# Altium PCB dc_cdi_pcb.PcbDoc (part 2 of 2)
Units mm, origin at the board's own origin, x right, y up, seen from the top; angles counter-clockwise.
Board outline 102.36 x 169.29 mm, 4 copper layers (Signal Top, Ground, Vcc, Signal Bottom), stack 0.603 mm thick; 125 components, 82 nets, 511 pads, 71 vias.
Unrouted connection lines stored in the file: 139.
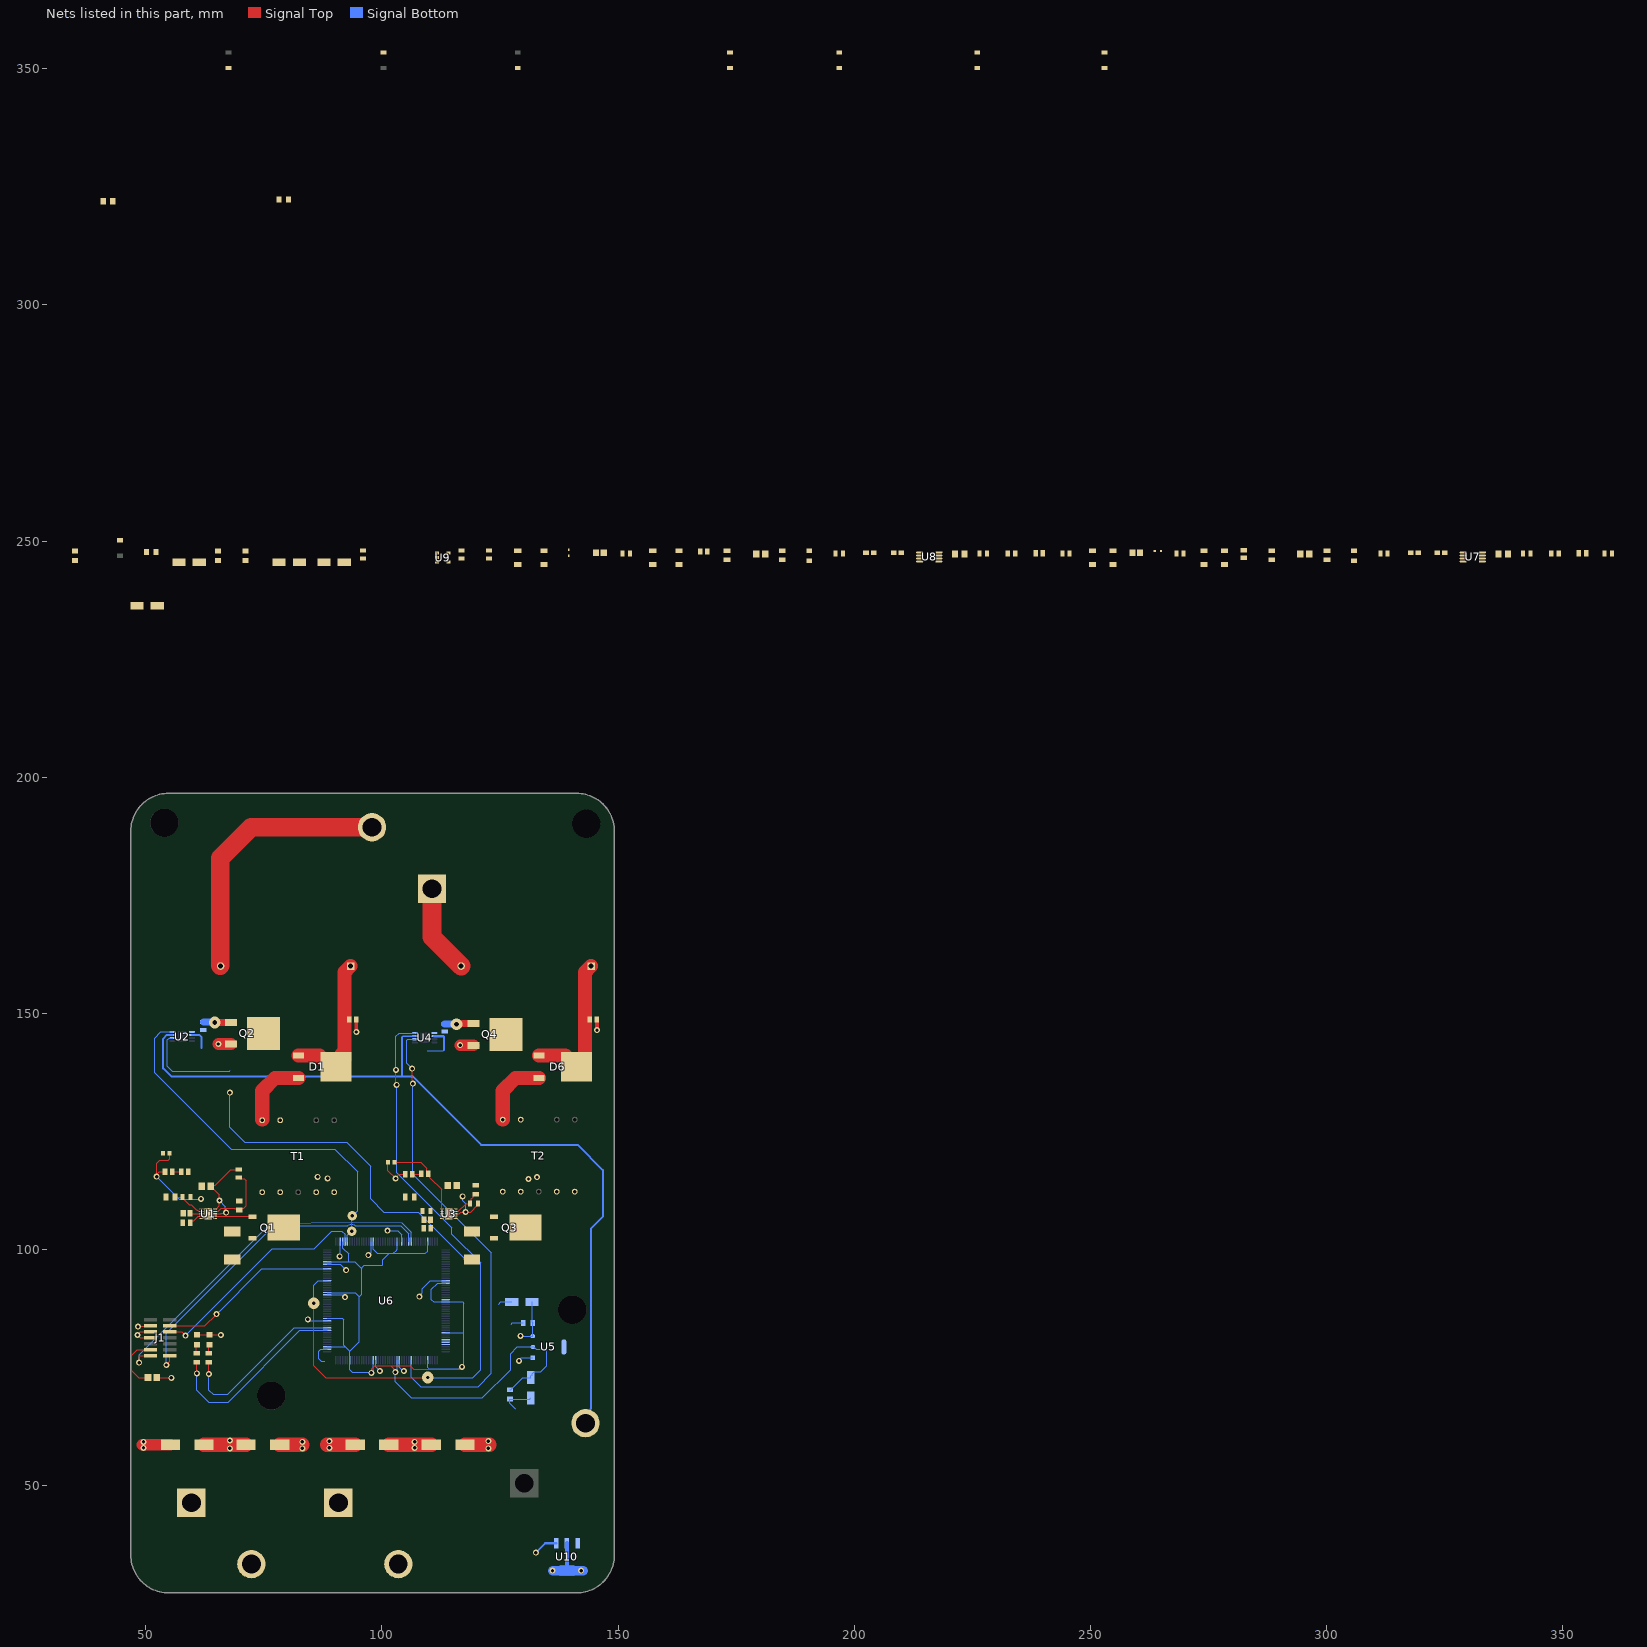
[diagram p4: the nets of this part, all layers, seen from the top]

## Part data (continued)
R17 R18: library part CMP-2001-03989-2, "RES Thick Film, 510Ω, 1%, 0.125W, 100ppm/°C, 0805", Case Code (Imperial)=0805, Case Code (Metric)=2012, Max Operating Temperature=155°C, Max Power Dissipation=125mW, Min Operating Temperature=-55°C, Package Quantity=10, Resistance=510R, Temperature Coefficient=100ppm/°C, Tolerance=1%, Voltage Rating=150V, Case/Package=0805, Composition="Thick Film", Contact Plating=Tin, Depth=1.25mm, Features="Automotive AEC-Q200", Height=0.45mm, Lead Free="Lead Free", Length=2mm, Military Standard=Not, Mount="Surface Mount", Number of Terminations=2, Packaging="Tape and Reel", Power Rating=125mW, Radiation Hardening=No, Termination=SMD/SMT, Voltage Rating (DC)=150V, Weight=0.000194oz, Width=0.049inch
R19: library part CMP-2000-05025-1, "Chip Resistor, 10 KOhm, +/- 5%, 0.125 W, -55 to 155 degC, 0805 (2012 Metric), RoHS, Tape and Reel", Manufacturer=Yageo, Package Description="2-Pin Surface Mounted Device, Body 2 x 1.25 mm", Package Reference=805, Power Rating=250mW, Resistance=10kohm, Resistance Tolerance=±5%, Resistor Case Style=0805[2012Metric], Resistor Element Type=ThickFilm, Temperature Coefficient=±100ppm/degC, Voltage Rating=150V, Automotive Qualification Standard=-, Datasheet URL=http://www.yageo.ru/pdf/RC0805.pdf, Datasheet Version="REV. 2, 09/2004", Manufacturer URL=http://www.yageo.com/, MSL=MSL1-Unlimited, Packaging=CutTape, Product Range=RCSeries, SVHC=ToBeAdvised
R20: library part CMP-2001-00580-1, Manufacturer=Panasonic, Part Number=ERA6AEB101V
R21 R32: library part CMP-08839-014008-1, "Thick Film Chip Resistor, 0805, 820kΩ, 5%, 200ppm/°C, 0.125W, 150V", Case Code (Imperial)=0805, Case Code (Metric)=2012, Max Operating Temperature=155°C, Max Power Dissipation=125mW, Min Operating Temperature=-55°C, Package Quantity=1, Resistance=820kR, Resistor Type="Thick Film", Temperature Coefficient=200ppm/°C, Tolerance=5%, Voltage Rating (DC)=150V, Case/Package=0805, Features="Automotive AEC-Q200", Height=0.024inch, Lead Free="Lead Free", Length=0.079inch, Number of Terminations=2, Packaging="Tape and Reel", RoHS Compliant=Yes, Series=MCR10, Width=0.049inch
R22 R33: library part CMP-26527-000664-1, "150kΩ ±5% 0.125W 0805 Thick Film Chip Resistor AEC-Q200 compliant", Case Code (Imperial)=0805, Case Code (Metric)=2012, Max Operating Temperature=155°C, Max Power Dissipation=125mW, Min Operating Temperature=-55°C, Resistance=150kR, Resistor Type="Thick Film", Temperature Coefficient=200ppm/°C, Tolerance=5%, Case/Package=0805, Construction=Rectangular, Contact Plating=Tin, Depth=1.25mm, Features="Automotive AEC-Q200", Height=0.026inch, Lead Free="Lead Free", Length=0.079inch, Military Standard=Not, Mount="Surface Mount", Number of Terminations=2, Packaging="Tape and Reel", Power Rating=125mW, Radiation Hardening=No, RoHS Compliant=Yes, Series=RMCF, Size Code=0805, Width=0.049inch
R23 R25 R31 R34 R36 R42: library part CMP-08839-008650-1, "Thick Film Chip Resistor, 0805, 2.2MΩ, 5%, 200ppm/°C, 0.125W, 150V", Case/Package=0805, Max Operating Temperature=155°C, Max Power Dissipation=125mW, Min Operating Temperature=-55°C, Resistance=2.2MR, Resistor Type="Thick Film", Temperature Coefficient=200ppm/°C, Tolerance=5%, Voltage Rating (DC)=150V, Contact Plating=Tin, Lead Free="Lead Free", Mount="Surface Mount", Number of Terminations=2, Packaging="Tape and Reel", Power Rating=125mW, RoHS Compliant=Yes, Series=MCR, Size Code=0805
R24 R35: library part CMP-13261-002689-1, "Res Thick Film 0805 68kΩ 5% 0.125W ±100ppm/°C Molded SMD T/R", Case Code (Imperial)=0805, Case Code (Metric)=2012, Max Operating Temperature=155°C, Max Power Dissipation=125mW, Min Operating Temperature=-55°C, Resistance=68kR, Temperature Coefficient=100ppm/°C, Tolerance=5%, Voltage Rating (DC)=150V, Case/Package=0805, Composition="Thick Film", Contact Plating=Tin, Features="Moisture Resistant", Height=0.024inch, Lead Free="Lead Free", Length=0.079inch, Number of Terminations=2, Packaging="Tape and Reel", Power Rating=125mW, Radiation Hardening=No, Width=0.049inch
R26 R37: library part CMP-2001-01786-2, "RES SMD 12K OHM 0.5% 1/8W 0805", Manufacturer=Yageo, Package=RT0805, Power Rating=0.125W, Resistance=12KΩ, Temperature="-55°C to +155°C", Temperature Coefficient="50 ppm/°C", Temperature Range High=+155°C, Temperature Range Low=-55°C, Tolerance=0.01, Voltage Rating=150V, Automotive=No, Category=Res, ComponentLink2Description=Datasheet, ComponentLink2URL=http://www.yageo.com/documents/recent/PYu-RT_1-to-0.01_RoHS_L_9.pdf, Composition="Thin Film", Device Class L1="Passive Components", Device Class L2=Resistors, Device Class L3="Chip SMD Resistors", Digikey Description="RES SMD 12K OHM 0.5% 1/8W 0805", Footprint Url=http://www.yageo.com/exep/pages/download/literatures/PYu-R_Mount_10.pdf, Height=0.6mm, Ipc Land Pattern Name=RESC200125X50, Lead Free=Yes, Manufacturer Part Number=RT0805DRE0712KL, Mouser Description="Thin Film Resistors - SMD 1/8W 12K ohm .5% 50ppm", Octopart=https://octopart.com/rt0805dre0712kl-yageo-1455327, RoHS=TRUE, Series=RT
R27 R38: library part CMP-2001-03688-2, Case Code (Imperial)=0805, Case Code (Metric)=2012, Manufacturer Package Identifier=CRCW0805-e3, Max Operating Temperature=155°C, Max Power Dissipation=125mW, Min Operating Temperature=-55°C, Resistance=22kΩ, Temperature Coefficient=100ppm/°C, Tolerance=1%, Voltage Rating=150V, Case/Package=0805, Composition="Thick Film", Contact Plating=Tin, Depth=1.25mm, Features="Automotive AEC-Q200", Height=450µm, Lead Free="Lead Free", Length=2mm, Military Standard=Not, Mount="Surface Mount", NexarPartId=39823174, Number of Pins=2, Number of Terminations=2, Packaging="Cut Tape (CT)", Power Rating=125mW, Radiation Hardening=No, REACH SVHC=Unknown, RoHS=Compliant, Schedule B="8533210045, 8533210045", Termination=SMD/SMT, Voltage Rating (DC)=150V, Weight=5.499807mg, Width=1.2446mm
R28 R39: library part CMP-1013-00050-2, Manufacturer=Panasonic, Part Number=ERJ-6GEYJ101V
R29 R40: library part CMP-02407-011730-1, "RES Thick Film, 10MΩ, 1%, 0.125W, 100ppm/°C, 0805", Case Code (Imperial)=0805, Case Code (Metric)=2012, Max Operating Temperature=155°C, Max Power Dissipation=125mW, Min Operating Temperature=-55°C, Package Quantity=10000, Resistance=10MR, Resistor Type="Thick Film", Temperature Coefficient=100ppm/°C, Tolerance=1%, Voltage Rating=150V, Case/Package=0805, Features="Automotive AEC-Q200", Height=0.02inch, Lead Free="Lead Free", Length=0.079inch, Number of Terminations=2, Packaging="Tape and Reel", Power Rating=125mW, RoHS Compliant=Yes, Series=CRCW, Termination=SMD/SMT, Weight=0.000194oz, Width=1.25mm
R30 R41: library part CMP-2001-00337-1, Manufacturer=Panasonic, Part Number=ERJ-6GEYJ103V
R43 R44 R45: library part CMP-2001-04910-2, "RES Thick Film, 10kΩ, 5%, 0.125W, 200ppm/°C, 0805", Case Code (Imperial)=0805, Case Code (Metric)=2012, Max Operating Temperature=155°C, Min Operating Temperature=-55°C, Package Quantity=5000, Power Rating=125mW, Resistance=10kR, Temperature Coefficient=200ppm/°C, Tolerance=5%, Voltage Rating=150V, Case/Package=0805, Composition="Thick Film", Contact Plating=Tin, Depth=1.25mm, Height=0.45mm, Lead Free="Lead Free", Length=2mm, Military Standard=Not, Mount="Surface Mount", Packaging="Tape and Reel", Radiation Hardening=No, Termination=SMD/SMT, Voltage Rating (DC)=150V, Weight=0.000194oz, Width=1.25mm
T1 T2: "No Description Available", Mfr_Name=Myrra, RefDes=RefDes, Type=Type
  T1: ComponentLink1Description="New link"
U1 U3: library part CMP-09139-000585-1, "IC REG CTRLR MULT TOPOLOGY 10DFN", Case/Package=DFN, Max Frequency=1MHz, Max Input Voltage=100V, Max Operating Temperature=125°C, Max Output Current=1.2A, Max Output Voltage=12V, Min Input Voltage=5.5V, Min Operating Temperature=-40°C, Package Quantity=121, Height=0.7mm, Length=3mm, Max Supply Voltage=100V, Min Supply Voltage=5.5V, Mount="Surface Mount", Number of Outputs=1, Number of Pins=10, Output Voltage=100V, Packaging=Rail/Tube, REACH SVHC="No SVHC", RoHS Compliant=Yes, Series=-, Switching Frequency=1MHz, Topology=Boost, Width=3mm
U2 U4: library part CMP-09133-000023-1, "IC GATE DRVR LOW-SIDE 8MINISOIC", Case/Package=MSOP, Max Input Voltage=18V, Max Operating Temperature=125°C, Max Output Current=4A, Max Supply Current=3mA, Min Input Voltage=4.5V, Min Operating Temperature=-40°C, Package Quantity=3000, Channel Type=Independent, Fall Time=25ns, Lead Free="Contains Lead", Max Supply Voltage=18V, Min Supply Voltage=4.5V, Mount="Surface Mount", Nominal Supply Current=3mA, Number of Drivers=2, Number of Outputs=2, Number of Pins=8, Output Current=4A, Packaging="Tape and Reel", Propagation Delay=35ns, Rise Time=14ns, RoHS Compliant=Yes, Series=-, Supply Current=3mA, Turn-On Delay Time=35ns
U5: library part CMP-209535-000001-1, "LDO Voltage Regulators 1A, 3.3V", Dropout Voltage=1.1V, Manufacturer="Advanced Monolithic Systems", Max Junction Temp=+125°C, Max Power Dissipation=1.2W, Max Supply Voltage=15V, Nominal Supply Current=5mA, Output Current=1A, Output Voltage=3.3V, Package=AMS1117, Temperature="-40°C to +125°C", Temperature Range Low=-40°C, Automotive=No, Category=IC, ComponentLink2Description=Datasheet, ComponentLink2URL=http://www.advanced-monolithic.com/pdf/ds1117.pdf, Device Class L1="Integrated Circuits (ICs)", Device Class L2="Power Management ICs", Device Class L3="Voltage Regulators - Linear", Height=1.8mm, Ipc Land Pattern Name=SOT229P700X180-4, Lead Free=Yes, Manufacturer Part Number=AMS1117-3.3, Number of Outputs=1, Octopart=https://octopart.com/ams1117-3.3-advanced+monolithic+systems-25899300, Output Type=Fixed, RoHS=TRUE, Standoff Height=0.64mm, Temperature Range High=+125°C
U6: library part CMP-0243-00078-2, "ARM Cortex-M4 32-bit MCU+FPU, 225 DMIPS, 2048 kB Flash, 256 kB Internal RAM, 140 I/Os, 176-pin LQFP, -40 to 85 degC, Tray", I/Os (High Current)=140, Manufacturer=STMicroelectronics, Operating Frequency(F) (Processor speed) (MHz)=180, Supply Voltage(Vcc) max (V)=3.6, Supply Voltage(Vcc) min (V)=1.8, ComponentLink1Description="Manufacturer URL", ComponentLink1URL=http://www.st.com/web/en/home.html, ComponentLink2Description=Datasheet, ComponentLink2URL=http://www.st.com/st-web-ui/static/active/en/resource/technical/document/data_brief/DM00053488.pdf, ComponentLink3Description="Package Specification", ComponentLink3URL=http://www.st.com/st-web-ui/static/active/en/resource/technical/document/datasheet/DM00035129.pdf, Core="ARM Cortex-M4", D/A Converter=2x12-bit, DatasheetVersion="Rev. 2", FLASH Size (Prog) (kB)=2048, Internal RAM Size (kB)=256, Mounting Technology="Surface Mount", PackageDescription="176-Pin Low Profile Quad Flat Package, 24 x 24 mm Body, 0.5 mm Pitch", PackageReference=LQFP176, PackageVersion="Rev. 4, 06/2013", Packing=Tray, PartNumber=STM32F429IIT6
U7 U8: library part CMP-0384-01726-2, "Double Channel Rail-to-Rail Operational Amplifier, 200 KHz BW, 40 mV/us SR, Industrial, 8-pin SOP (RM-8), Tube", Amplifiers Per Package=2, Generic Part Number=ADA4051-2, Input Bias Current=20pA, Input Offset Voltage=2uV, Manufacturer="Analog Devices", Code_JEDEC=MO-187-AA, ComponentLink1Description="Manufacturer URL", ComponentLink1URL=http://www.analog.com/en/index.html, ComponentLink2Description=Datasheet, ComponentLink2URL=http://www.analog.com/static/imported-files/data_sheets/ADA4051-1_4051-2.pdf, ComponentLink3Description="Package Specification", ComponentLink3URL=http://www.analog.com/static/imported-files/packages/PKG_PDF/MSOP%28RM%29/RM_8.pdf, ComponentLink4Description="Reference Circuit", ComponentLink4URL=http://www.analog.com/en/all-operational-amplifiers-op-amps/operational-amplifiers-op-amps/ada4051-2/products/product.html#product-recommendations, DatasheetVersion="Rev. B", Iq/Amp=13uA, Mounting Technology="Surface Mount", PackageDescription="8-Pin Mini Small Outline Package, Body 3 x 3 mm, Pitch 0.65 mm", PackageReference=RM-8, PartNumber=ADA4051-2ARMZ, RevisionNote="Reference Circuit URL fixed", Slew Rate=40mV/us, Small Signal Bandwidth=200KHz, V Span Max=5.5V, V Span Min=1.8V
U9: library part CMP-0384-01443-3, "Single Channel RRIO Operational Amplifier, 80 MHz BW, 35 V/us SR, Industrial, 5-pin SOT23 (RJ-5), Reel", Amplifiers Per Package=1, Generic Part Number=AD8031, Input Bias Current=450nA, Input Offset Voltage=1mV, Manufacturer="Analog Devices", Code_JEDEC=MO-178-AA, ComponentLink1Description="Manufacturer URL", ComponentLink1URL=http://www.analog.com/en/index.html, ComponentLink2Description=Datasheet, ComponentLink2URL=http://www.analog.com/static/imported-files/data_sheets/AD8031_8032.pdf, ComponentLink3Description="Package Specification", ComponentLink3URL=http://www.analog.com/static/imported-files/packages/PKG_PDF/SOT-23(RJ)/RJ_5.pdf, ComponentLink4Description="Reference Circuit", ComponentLink4URL=http://www.analog.com/en/all-operational-amplifiers-op-amps/operational-amplifiers-op-amps/ad8031/products/product.html#product-recommendations, DatasheetVersion="Rev. D", Iq/Amp=900uA, Mounting Technology="Surface Mount", PackageDescription="5-Pin Small Outline Transistor Package, Body 2.9 x 1.6 mm, Pitch 0.95 mm", PackageReference=RJ-5, PackageVersion=121608-A, Packing=Reel, PartNumber=AD8031ARTZ-REEL7, RevisionNote="Reference Circuit URL fixed", Slew Rate=35V/us, Small Signal Bandwidth=80MHz, V Span Max=12V, V Span Min=2.7V
U10: library part CMP-04917-000007-1, "IC REG LINEAR 5V 1.5A SOT223-4", Dropout Voltage=2V, Manufacturer="Texas Instruments", Max Junction Temp=+150°C, Max Supply Voltage=30V, Min Supply Voltage=7.5V, Nominal Supply Current=8mA, Output Current=1.5A, Output Voltage=5V, Package=DCY0004A, Temperature="0°C to +125°C", Temperature Range High=+125°C, Temperature Range Low=0°C, Accuracy Percentage=3%, Automotive=No, Category=IC, ComponentLink2Description=Datasheet, ComponentLink2URL=http://www.ti.com/lit/ds/symlink/lm7800.pdf, Device Class L1="Integrated Circuits (ICs)", Device Class L2="Power Management ICs", Device Class L3="Voltage Regulators - Linear", Digikey Description="IC REG LINEAR 5V 1.5A SOT223-4", Height=1.8mm, Lead Free=Yes, Manufacturer Part Number=LM7805MP/NOPB, Number of Outputs=1, Octopart=https://octopart.com/lm7805mp%2Fnopb-texas+instruments-74629991, Output Type=Fixed, RoHS=TRUE, Standoff Height=0.02mm

## Free pads (board coordinates)
  round 6 hole 6 paste-2539.97 mask+0: 3(53.975,190.373) 3(76.581,69.088) 3(140.335,87.249) 3(143.256,190.119)

## Via types
v1: diameter 1.27, hole 0.711, Signal Top to Signal Bottom, 65 vias
v2: diameter 2, hole 0.711, Signal Top to Signal Bottom, 2 vias
v3: diameter 2.5, hole 0.711, Signal Top to Signal Bottom, 2 vias
v4: diameter 2.5, hole 1, Signal Top to Signal Bottom, 2 vias

## Nets (pads, with @x,y where several pads share a name; then routed paths per layer and width w, separated by ;. In a path a pad name is that pad's centre, name@x,y a point inside that pad or via, vN(x,y) a via of type N, cw(c..) or ccw(c..) an arc to the next point about the centre after c; other vN are vias at no path point)
+3V3: C14.2 C16.1 C17.1 J1.3 R19.2 U5.2 U5.4 U6.15 U6.23 U6.36 U6.49 U6.62 U6.72 U6.82 U6.91 U6.103 U6.114 U6.127 U6.136 U6.149 U6.159 U6.172 | length 215
  Signal Top w0.254: v1(48.387,83.693) 48.45,83.757 50.985,83.757 J1.3@51.048,83.82 ; v1(97.79,73.914) 97.873,73.997 97.873,74.759 98.552,75.438 101.832,75.438 ; v1(102.87,74.041) 102.87,74.316 102.585,74.601 102.585,74.685 101.907,75.364 101.832,75.438 ; v1(116.967,75.184) 116.818,75.184 116.31,74.676 106.807,74.676 106.045,75.438 101.832,75.438
  Signal Bottom w0.254: U6.91@88.415,79.404 92.3,79.404 ; U6.103@88.415,85.404 91.634,85.404 91.948,85.09 91.948,79.756 92.3,79.404 ; U6.114@88.415,90.904 94.389,90.904 95.235,90.058 ; U6.127@88.415,97.404 92.964,97.404 ; U6.136@91.715,101.704 91.715,100.309 92.964,99.06 92.964,97.404 ; U6.72@98.215,76.604 98.215,74.378 98.254,74.378 v1(97.79,73.914) 97.663,74.041 93.726,74.041 93.215,74.552 U6.82@93.215,76.604 93.215,78.489 ; U6.149@98.215,101.704 98.215,100.032 99.06,99.187 101.592,99.187 ; v1@102.87,74.422 v1(102.87,74.041) ; U6.62@103.215,76.604 103.215,74.386 v1(102.87,74.041) ; U6.159@103.215,101.704 103.215,100.04 103.124,99.949 103.124,99.905 102.384,99.165 ; 109.706,75.416 109.706,74.952 109.855,74.803 116.586,74.803 v1(116.967,75.184) 117.348,75.565 117.348,82.55 ; 109.706,75.594 109.715,75.603 ; U6.49@109.715,76.604 109.715,75.603 ; U6.172@109.715,101.704 109.715,99.682 109.198,99.165 102.384,99.165 ; 109.728,75.438 109.715,75.425 109.715,75.603 ; 109.736,75.624 109.715,75.603 ; U6.36@113.515,82.404 117.202,82.404 117.348,82.55 ; U6.23@113.515,88.9 117.094,88.9 117.348,88.646 117.348,82.55 ; U6.23@113.515,88.904 113.511,88.9 110.998,88.9 110.49,89.408 110.49,91.567 111.827,92.904 U6.15@113.515,92.904 ; C16.1@127.127,70.342 127.252,70.342 129.808,72.898 C14.2@131.572,72.898 131.572,73.257 131.721,73.406 131.826,73.406 131.826,73.752 132.245,74.171 133.607,74.171 134.874,75.438 134.874,78.591 134.568,78.898 132.671,78.898 132.193,79.375 U5.2@131.96,79.375 128.651,79.375 127.254,77.978 127.254,74.549 121.285,68.58 106.268,68.58 102.87,71.978 v1(102.87,74.041) ; 92.3,79.404 93.215,78.489 ; 92.964,97.404 94.239,97.404 95.619,96.024 ; 93.215,78.489 95.235,80.509 95.235,90.058 ; 95.235,90.058 95.758,90.581 95.758,95.885 95.619,96.024 ; 95.619,96.024 96.243,96.647 100.054,96.647 100.203,96.796 100.203,97.798 101.592,99.187 ; 101.592,99.187 102.362,99.187 102.384,99.165
+5: C30.2 C31.1 R44.2 U2.6 U4.6 U7.8 U8.8 U9.5 U10.3 | length 13
  Signal Bottom w0.254: 109.601,142.113 113.03,142.113 113.157,142.24 ; U4.6@111.125,145.176 U4.6@111.14,145.161 ; 113.034,145.161 113.157,145.038
  Signal Bottom w0.4: U2.6@59.817,145.43 61.373,145.43 61.849,144.954 61.849,142.683
  Signal Bottom w0.5: 113.157,142.24 113.157,145.038
  Signal Bottom w0.54: U4.6@111.14,145.161 113.034,145.161
GND: C1.1 C2.2 C4.1 C5.1 C6.2 C7.1 C8.2 C10.1 C11.1 C12.2 C13.1 C14.1 C15.2 C16.2 C17.2 C26.1 C27.1 C28.2 C29.2 C30.1 C31.2 C32.1 C33.2 C34.1 C35.1 C36.1 C37.1 D5.2 D10.2 D16.1 D17.2 D21.1 D22.2 J1.5 J1.7 J2.2 LED1.1 LED2.1 Q2.3 Q4.3 R3.1 R4.1 R5.1 R7.1 R11.1 R12.1 R13.1 R15.1 R20.1 R27.1 R38.1 R45.1 T1.4 T2.4 U1.5 U1.11 U3.5 U3.11 U5.1 U6.14 U6.22 U6.61 U6.71 U6.90 U6.102 U6.113 U6.126 U6.135 U6.148 U7.4 U8.4 U9.2 U10.2 U10.4 | length 192.9
  Signal Top w0.254: J1.7@51.048,81.28 48.895,81.28 v1(48.26,81.915) 48.895,82.55 J1.5@51.048,82.55 ; R20.1@52.385,72.898 55.372,72.898 v1(55.435,72.834) v1@55.499,72.771 ; LED1.1@60.833,81.949 LED2.1@63.5,81.949 63.534,81.915 v1(65.913,81.915) ; Q2.3@68.044,143.51 Q2.3@68.072,143.482 ; 83.185,58.674 83.947,57.912 ; C2.2@94.603,148.717 C2.2@94.615,148.705 ; C11.1@101.306,118.491 101.306,116.694 v1(102.944,115.056) 102.944,115.23 103.665,115.951 C12.2@104.914,115.951 ; C8.2@145.53,148.717 C8.2@145.542,148.705
  Signal Top w0.7: v1(94.615,146.05) C2.2@94.615,148.705
  Signal Top w0.8: v1(145.542,146.431) C8.2@145.542,148.705
  Signal Top w2.5: 49.276,58.674 C37.1@55.251,58.674 ; v1(65.405,143.51) Q2.3@68.044,143.51 ; v1(116.586,143.256) 116.6,143.242 Q4.3@119.377,143.242
  Signal Top w3: C34.1@78.353,58.674 83.185,58.674 ; 88.392,58.674 C35.1@94.367,58.674 ; C36.1@117.596,58.674 122.809,58.674
  Signal Bottom w0.254: v1(67.818,133.223) 67.818,125.857 70.993,122.682 92.583,122.682 97.663,117.602 97.663,110.744 100.457,107.95 107.696,107.95 117.475,98.171 117.475,97.79 ; v1(84.328,85.217) 84.641,84.904 U6.102@88.415,84.904 ; 87.884,76.327 87.122,76.327 86.614,76.835 86.614,78.486 87.032,78.904 U6.90@88.415,78.904 ; U6.113@88.415,90.404 91.714,90.404 v1(92.202,89.916) ; U6.126@88.415,96.904 91.183,96.904 v1(92.456,95.631) ; v1(91.059,98.552) 91.206,98.699 91.206,101.695 U6.135@91.215,101.704 ; v1(97.155,98.806) 97.715,99.366 U6.148@97.715,101.704 ; U6.71@98.715,76.604 98.715,75.148 v1(99.568,74.295) ; U6.61@103.715,76.604 103.715,75.105 104.525,74.295 v1(104.648,74.295) ; v1(107.95,90.043) 107.95,90.21 108.585,90.845 108.585,91.694 110.295,93.404 U6.14@113.515,93.404 ; 124.714,88.392 125.222,88.9 C13.1@127.517,88.9 ; 127.381,84.201 127.635,84.455 C15.2@129.937,84.455 ; 128.27,66.294 127.127,67.437 C16.2@127.127,68.342 131.316,68.342 C14.1@131.572,68.598 ; v1@128.905,76.454 129.536,77.085 U5.1@131.96,77.085
  Signal Bottom w0.854: U10.4@139.192,32.025 U10.2@139.192,37.825
  Signal Bottom w2: v1(136.141,32.025) U10.4@139.192,32.025 v1(142.191,32.025) v1@142.621,32.025
  other v1: 83.185,57.912 122.555,57.912 49.53,58.039 88.9,58.039 49.53,59.309 83.185,59.309 88.9,59.436 122.555,59.436 129.032,76.454
NetC1_2: C1.2 C7.2 C13.2 C15.1 C32.2 C33.1 J2.1 R1.2 R9.2 T1.7 T1.10 U1.8 U1.10 U3.8 U3.10 U5.3 U10.1 | length 43.4
  Signal Top w0.254: C1.2@63.815,113.361 65.62,111.556 v1(65.62,110.392) 65.62,109.229 ; C1.2@63.815,113.411 64.046,113.642 64.747,113.642 68.034,116.929 R1.2@69.723,116.929 ; U1.8@64.662,107.577 65.97,107.577 66.04,107.647 66.88,107.647 v1(67.056,107.823) ; U1.10@64.966,108.575 65.62,109.229 ; 65.62,109.22 65.62,109.229 ; U3.8@115.589,107.569 116.41,107.569 116.713,107.872 117.651,107.872 v1(117.729,107.95) 118.831,107.95 120.358,109.477 R9.2@120.358,109.728
  Signal Bottom w0.254: v1(65.62,110.392) 66.899,109.114 66.899,107.98 v1(67.056,107.823) ; v1(117.094,111.252) 117.094,110.363 117.729,109.728 v1(117.729,107.95) ; v1@129.286,81.788 129.409,81.665 U5.3@131.96,81.665 131.96,84.432 C15.1@131.937,84.455 131.817,84.575 C13.2@131.817,88.9
  Signal Bottom w0.5: 134.599,37.825 U10.1@136.892,37.825
  Signal Bottom w0.54: v1(132.588,35.814) 134.599,37.825
  other v1: 129.347,81.727
NetC2_1: C2.1 C3.1 D1.1 D1.3 D2.1 Q2.4 R2.2 | length 34.5
  Signal Top w3: D1.1@82.357,141.074 86.8,141.074 D1.3@87.59,140.284 ; D1.3@88.707,140.284 D1.3@90.307,138.684 ; C3.1@93.379,160.02 92.075,158.716 92.075,142.041 ; D1.3@90.307,138.684 90.457,138.684 92.057,140.284 92.075,142.041 ; D1.3@90.307,138.684 90.551,138.928 90.551,140.064 92.075,142.041
NetC3_2: C3.2 J3.1 | length 57.7
  Signal Top w0.254: C3.2@65.786,160.113 C3.2@65.879,160.02
  Signal Top w4: C3.2@65.786,160.113 65.786,182.88 72.309,189.403 97.917,189.403
NetC4_2: C4.2 U1.3 | length 2.2
  Signal Top w0.254: C4.2@59.309,107.507 59.371,107.569 U1.3@61.517,107.569
NetC5_2: C5.2 R8.2 U1.1 | length 21.1
  Signal Top w0.254: v1(52.324,115.443) v1@52.324,115.951 ; R8.2@54.114,116.459 52.832,116.459 v1@52.324,115.951 ; C5.2@55.412,120.523 55.118,120.229 55.118,119.253 54.737,118.872 52.959,118.872 52.324,118.237 52.324,118.191 v1@52.324,115.951
  Signal Bottom w0.254: v1@52.08,115.443 v1(52.324,115.443) 57.15,110.617 61.595,110.617 v1(61.722,110.744)
NetC6_1: C6.1 R8.1 | length 1.9
  Signal Top w0.254: R8.1@55.614,116.459 C6.1@57.543,116.459
NetC8_1: C8.1 C9.1 D6.1 D6.3 D7.1 Q4.4 R10.2 | length 29.1
  Signal Top w0.254: D6.3@138.844,141.074 D6.3@141.605,141.074
  Signal Top w3: D6.1@133.284,141.074 D6.3@138.844,141.074 ; D6.3@139.634,140.284 D6.3@141.234,138.684 ; 143.002,142.041 143.002,148.844 143.002,158.716 C9.1@144.306,160.02
NetC9_2: C9.2 J3.2 | length 18.9
  Signal Top w4: 110.617,176.403 110.617,166.209 C9.2@116.806,160.02
NetC10_2: C10.2 U3.3
NetC11_2: C11.2 R16.2 U3.1 | length 17.2
  Signal Top w0.254: C11.2@102.656,118.491 108.204,118.491 109.478,117.217 109.478,116.79 109.478,116.648 109.627,116.499 109.724,116.499 110.198,116.025 110.198,115.227 112.649,112.776 112.649,108.712
NetC12_1: C12.1 R16.1 | length 2.2
  Signal Top w0.254: C12.1@106.414,115.951 108.47,115.951 R16.1@108.597,116.078
NetC18_1: C18.1 R29.1 R30.2
NetC18_2: C18.2 R26.1 R28.1 U7.7
NetC19_1: C19.1 R25.1 R27.2
NetC19_2: C19.2 C20.1 R23.1 R31.2
NetC20_2: C20.2 U7.3
NetC21_1: C21.1 C25.1 C27.2 C29.1 R21.2 R23.2 R24.2 R32.2 R34.2 R35.2 R43.1 U9.1
NetC21_2: C21.2 R29.2 U7.5
NetC22_1: C22.1 R40.1 R41.2
NetC22_2: C22.2 R37.1 R39.1 U8.7
NetC23_1: C23.1 R36.1 R38.2
NetC23_2: C23.2 C24.1 R34.1 R42.2
NetC24_2: C24.2 U8.3
NetC25_2: C25.2 R40.2 U8.5
NetC26_2: C26.2 C28.1 R44.1 R45.2 U9.3
NetC34_2: C34.2 C35.2 C36.2 C37.2 | length 17.9
  Signal Top w3: C37.2@62.351,58.674 C34.2@71.253,58.674 ; C35.2@101.467,58.674 C36.2@110.496,58.674
  other v1: 67.818,57.912 106.934,58.039 106.934,59.309 67.818,59.563
NetD1_2: D1.2 T1.5 | length 14.9
  Signal Top w3: T1.5@74.676,127.508 74.676,133.604 77.366,136.294 D1.2@82.357,136.294
NetD2_2: D2.2 D3.1
NetD3_2: D3.2 D4.1
NetD4_2: D4.2 D5.1
NetD6_2: D6.2 T2.5 | length 14.9
  Signal Top w3: T2.5@125.603,127.508 125.603,133.604 128.293,136.294 D6.2@133.284,136.294
NetD8_2: D8.2 D9.1
NetD11_2: LED2.2 R17.2 | length 1.8
  Signal Top w0.254: R17.2@63.373,78.105 63.373,79.722 LED2.2@63.5,79.849
NetD12_2: LED1.2 R18.2 | length 1.8
  Signal Top w0.254: R18.2@60.706,78.105 60.706,79.722 LED1.2@60.833,79.849
NetD13_1: D13.1 D14.2 R28.2 U6.40
NetD13_2: D13.2 D15.2 D16.2
NetD14_1: D14.1 D15.1 D17.1
NetD18_1: D18.1 D19.2 R39.2 U6.41
NetD18_2: D18.2 D20.2 D21.2
NetD19_1: D19.1 D20.1 D22.1
NetJ1_4: J1.4 U6.124 | length 38.3
  Signal Top w0.254: J1.4@55.118,83.82 62.484,83.82 v1(64.998,86.334)
  Signal Bottom w0.254: v1(64.998,86.334) 74.568,95.904 87.357,95.904 U6.124@88.415,95.904
NetJ1_6: J1.6 U6.137 | length 48.4
  Signal Top w0.254: J1.6@55.118,82.55 57.658,82.55 v1(58.42,81.788)
  Signal Bottom w0.254: v1(58.42,81.788) 76.835,100.203 85.725,100.203 89.408,103.886 91.567,103.886 92.207,103.246 92.207,102.713 92.215,102.705 U6.137@92.215,101.704
NetJ1_11: J1.11 R20.2 | length 11.8
  Signal Top w0.254: R20.2@50.485,72.898 48.514,72.898 46.99,74.422 46.99,77.47 48.26,78.74 J1.11@51.048,78.74
NetJ1_13: J1.13 U6.165 | length 77.3
  Signal Top w0.254: v1(48.641,76.073) 48.641,77.321 48.79,77.47 J1.13@51.048,77.47
  Signal Bottom w0.254: v1(48.641,76.073) 48.641,77.724 76.507,105.59 93.578,105.775 cw(c93.599,103.886) 93.676,105.773 ccw(c93.73,107.153) 93.715,105.772 104.267,105.664 104.341,105.59 106.244,103.687 U6.165@106.244,101.704
NetJ1_14: J1.14 U6.164 | length 72.1
  Signal Top w0.254: v1(54.376,75.545) 54.376,75.585 55.118,76.327 J1.14@55.118,77.47
  Signal Bottom w0.254: v1(54.376,75.545) 54.376,82.316 77.089,105.029 92.824,105.029 cw(c93.599,103.886) 94.374,105.029 104.013,105.029 105.726,103.316 105.726,102.744 ; U6.164@105.715,101.704 105.715,102.662 105.736,102.684
NetJ4_1: J4.1 R36.2
NetJ4_2: J4.2 R25.2
NetQ1_1: Q1.1 U1.7 | length 8.1
  Signal Top w0.254: U1.7@64.662,107.069 68.713,107.069 68.778,107.004 70.922,107.004 70.987,107.069 72.517,107.069 Q1.1@72.644,106.942
NetQ1_2: Q1.2 T1.6 T1.9
  other v1: 88.519,115.062 86.422,115.4
NetQ1_3: Q1.3 R5.2 U1.6
NetQ2_1: Q2.1 R6.1 | length 5.9
  Signal Top w1.5: v4(64.643,148.082) Q2.1@68.072,148.082
  Signal Bottom w1.5: R6.1@62.23,148.145 64.58,148.145 v4(64.643,148.082)
NetQ3_1: Q3.1 U3.7
NetQ3_2: Q3.2 T2.6 T2.9
NetQ3_3: Q3.3 R13.2 U3.6
NetQ4_1: Q4.1 R14.1 | length 6.1
  Signal Top w0.254: Q4.1@119.363,147.828 Q4.1@119.377,147.842
  Signal Top w1.5: v4@116.713,147.828 Q4.1@119.363,147.828
  Signal Bottom w0.254: v4@116.649,147.764 v4@116.713,147.828
  Signal Bottom w1.5: R14.1@113.284,147.764 v4@116.649,147.764
  other v4: 115.824,147.701
NetR1_1: R1.1 R4.2 U1.9 | length 14.1
  Signal Top w0.254: U1.9@64.975,108.067 65.176,108.067 65.195,108.085 65.33,108.085 65.957,108.712 68.875,108.712 68.914,108.674 69.572,108.674 R4.2@69.85,108.396 70.051,108.396 70.427,108.772 70.789,108.772 71.247,109.23 71.247,114.554 70.85,114.951 69.999,114.951 R1.1@69.723,115.227
NetR2_1: R2.1 R3.2 U1.2 | length 7
  Signal Top w0.254: R3.2@56.196,111.125 R2.1@57.849,111.125 57.849,110.875 59.206,109.517 59.647,109.517 60.706,108.458 60.814,108.458 61.195,108.077 61.564,108.077 61.572,108.069 U1.2@61.83,108.069
NetR6_2: R6.2 U2.5
NetR7_2: R7.2 U1.4 | length 2.7
  Signal Top w0.254: R7.2@59.449,105.664 59.449,105.715 59.797,106.063 60.156,106.063 61.154,107.061 61.564,107.061 U1.4@61.566,107.063
NetR9_1: R9.1 R12.2 U3.9 | length 6.4
  Signal Top w0.254: U3.9@115.589,108.069 116.192,108.069 117.851,109.728 R9.1@118.656,109.728 118.932,110.004 118.932,110.743 119.311,111.121 119.311,111.322 119.687,111.698 R12.2@119.888,111.698
NetR10_1: R10.1 R11.2 U3.2
NetR14_2: R14.2 U4.5
NetR15_2: R15.2 U3.4
NetR17_1: R17.1 U6.99 | length 37.1
  Signal Top w0.254: v1(63.373,73.66) R17.1@63.373,76.138
  Signal Bottom w0.254: v1(63.373,73.66) 63.373,70.231 64.262,69.342 67.357,69.342 81.419,83.404 87.414,83.404 U6.99@88.415,83.404
NetR18_1: R18.1 U6.98 | length 40.8
  Signal Top w0.254: v1(60.833,73.787) R18.1@60.833,76.138
  Signal Bottom w0.254: v1(60.833,73.787) 60.833,70.231 63.373,67.691 67.437,67.691 82.642,82.896 U6.98@88.415,82.896
NetR19_1: R19.1 U6.39
NetR21_1: R21.1 R22.2 U7.2
NetR22_1: R22.1 R30.1 R31.1 U7.1
NetR24_1: R24.1 R26.2 U7.6
NetR32_1: R32.1 R33.2 U8.2
NetR33_1: R33.1 R41.1 R42.1 U8.1
NetR35_1: R35.1 R37.2 U8.6
NetR43_2: R43.2 U9.4
NetT2_7: T2.7 T2.10
  other v1: 131.064,114.935 132.842,115.316
NetU2_2: U2.2 U6.161 | length 25.5
  Signal Bottom w0.254: U2.2@55.715,144.78 55.681,144.745 54.946,144.745 54.61,144.41 54.61,138.811 55.626,137.795 67.818,137.795 67.945,137.922 ; v1(101.191,104.013) 103.378,104.013 104.215,103.176 U6.161@104.215,101.704
NetU2_3: J5.2 U2.3 U4.3 | length 177
  Signal Bottom w0.254: 53.681,144.613 53.703,144.591 ; 104.521,145.161 104.648,145.161 ; U4.3@107.008,145.161 107.038,145.161 U4.3@107.023,145.176
  Signal Bottom w0.4: 53.681,144.613 54.498,145.43 U2.3@55.715,145.43 ; 53.703,144.591 53.703,138.36 55.42,136.643 104.267,136.643 ; 104.267,136.623 104.267,136.643 ; 104.521,145.161 104.267,144.907 104.267,136.643 ; 104.648,145.161 U4.3@107.008,145.161 ; J5.2@143.122,63.246 144.195,64.319 144.195,66.209 144.272,66.285 144.272,104.394 146.812,106.934 146.812,116.84 141.478,122.174 121.031,122.174 106.562,136.643 104.267,136.643
NetU2_4: U2.4 U6.138 | length 79
  Signal Top w0.254: v2(93.599,103.886) 93.599,107.023 v2(93.73,107.153)
  Signal Bottom w0.254: U2.4@55.715,146.08 53.243,146.08 51.943,144.78 51.943,137.414 68.072,121.285 90.043,121.285 94.869,116.459 94.869,108.204 94.72,108.055 v2(93.73,107.153) ; U6.138@92.715,101.704 92.715,103.002 v2(93.599,103.886)
NetU4_2: U4.2 U6.56 | length 102.3
  Signal Top w0.254: v1(106.426,138.303) 106.489,138.239 106.489,135.191 v1(106.553,135.128)
  Signal Bottom w0.254: U6.56@106.215,76.604 106.215,72.982 108.204,70.993 120.396,70.993 123.19,73.787 123.19,99.314 106.553,115.951 v1(106.553,135.128) ; v1(106.426,138.303) 105.283,139.446 105.283,144.272 105.537,144.526 U4.2@107.023,144.526
NetU4_4: U4.4 U6.119 | length 139.5
  Signal Top w0.254: v3@85.598,88.519 85.598,75.438 88.138,72.898 v3(109.728,72.898) ; v1(102.997,138.049) 102.997,135.001 v1(103.124,134.874)
  Signal Bottom w0.254: v3(85.598,88.646) 85.598,92.456 86.515,93.373 88.384,93.373 U6.119@88.415,93.404 ; v1(102.997,138.049) 102.997,145.161 103.662,145.826 U4.4@107.023,145.826 ; v1(103.124,134.874) 103.124,116.312 114.796,104.64 114.796,103.263 120.904,97.155 120.904,74.549 119.253,72.898 v3(109.728,72.898)
pads on no net: D7.2 D8.1 D9.2 D10.1 J1.1 J1.2 J1.8 J1.9 J1.10 J1.12 J5.1 T1.1 T1.2 T1.8 T2.1 T2.2 T2.8 U2.1 U2.7 U2.8 U2.9 U4.1 U4.7 U4.8 U4.9 U6.1 U6.2 U6.3 U6.4 U6.5 U6.6 U6.7 U6.8 U6.9 U6.10 U6.11 U6.12 U6.13 U6.16 U6.17 U6.18 U6.19 U6.20 U6.21 U6.24 U6.25 U6.26 U6.27 U6.28 U6.29 U6.30 U6.31 U6.32 U6.33 U6.34 U6.35 U6.37 U6.38 U6.42 U6.43 U6.44 U6.45 U6.46 U6.47 U6.48 U6.50 U6.51 U6.52 U6.53 U6.54 U6.55 U6.57 U6.58 U6.59 U6.60 U6.63 U6.64 U6.65 U6.66 U6.67 U6.68 U6.69 U6.70 U6.73 U6.74 U6.75 U6.76 U6.77 U6.78 U6.79 U6.80 U6.81 U6.83 U6.84 U6.85 U6.86 U6.87 U6.88 U6.89 U6.92 U6.93 U6.94 U6.95 U6.96 U6.97 U6.100 U6.101 U6.104 U6.105 U6.106 U6.107 U6.108 U6.109 U6.110 U6.111 U6.112 U6.115 U6.116 U6.117 U6.118 U6.120 U6.121 U6.122 U6.123 U6.125 U6.128 U6.129 U6.130 U6.131 U6.132 U6.133 U6.134 U6.139 U6.140 U6.141 U6.142 U6.143 U6.144 U6.145 U6.146 U6.147 U6.150 U6.151 U6.152 U6.153 U6.154 U6.155 U6.156 U6.157 U6.158 U6.160 U6.162 U6.163 U6.166 U6.167 U6.168 U6.169 U6.170 U6.171 U6.173 U6.174 U6.175 U6.176
copper on no net: | length 33.8
  Signal Top w0.254: v1(67.818,137.795) 67.818,133.223 67.945,133.096 ; v1(103.251,110.49) 103.418,110.49 104.053,111.125 104.232,111.125 105.221,111.125 ; 107.123,111.125 108.776,111.125 108.776,110.875 110.133,109.517 110.574,109.517 111.633,108.458 111.741,108.458 112.122,108.077 112.491,108.077 112.499,108.069 112.757,108.069 ; 110.236,107.507 110.298,107.569 112.444,107.569 ; 110.376,105.664 110.376,105.715 110.724,106.063 111.083,106.063 112.081,107.061 112.491,107.061 112.493,107.063 ; 115.589,107.069 123.444,107.069 123.571,106.942 ; 115.824,113.538 116.756,113.538 116.905,113.538 117.094,113.349 117.094,111.252 117.094,109.767 116.547,109.22 115.902,108.575
  Vcc w0.254: 132.08,115.316 132.207,115.443
  other v1: 128.27,66.294 87.757,76.2 127.381,84.201 124.714,88.392

## Polygon pours and split planes (outlines as drawn)
NetC1_2 on Vcc "NETC1_2_L03_P003" (solid, pour order 3): 45.085,120.396 45.339,120.65 149.225,120.65 149.225,26.152 44.841,26.152
GND on Ground "GND_L02_P004" (solid, pour order 4): 45.085,186.309 45.085,186.69 45.085,28.956 150.241,28.956 150.241,195.58 53.721,195.58
GND on Signal Top "GND_L01_P006" (solid, pour order 6): 45.974,115.062 50.673,119.761 68.072,119.761 72.136,115.697 72.136,100.965 74.422,98.679 86.36,98.679 94.488,106.807 94.488,117.729 96.266,119.507 96.393,119.38 115.57,119.38 122.428,112.522 122.428,99.314 125.095,96.647 125.222,96.774 132.969,96.774 146.685,110.49 146.685,116.713 149.352,119.38 149.352,28.956 45.847,28.956 45.847,115.062

## Other copper
Signal Top:
  region net NetC5_2: 61.341,108.458 61.214,108.585 61.214,110.744 61.468,110.998 61.976,110.998 61.976,110.363 61.595,109.982 61.595,108.966 62.103,108.458
  region net NetC2_1: 71.501,149.352 72.009,149.86 93.218,149.86 93.218,139.065 92.837,138.684 91.821,139.7 72.517,139.7 72.517,139.827 71.501,140.843
  region net NetC8_1: 122.809,142.113 125.349,139.573 142.875,139.573 144.018,140.716 144.018,149.733 123.444,149.733 122.809,149.098 122.809,142.24
  region: 117.348,102.616 117.475,102.743 121.539,102.743 122.555,101.727 124.714,101.727 124.714,102.997 122.555,105.156 117.729,105.156 116.205,106.68 115.443,106.68 115.443,104.521
  region net GND: 114.935,104.648 120.264,99.319 121.793,99.319 121.793,97.155 123.571,95.377 149.352,95.377 149.352,91.313 111.76,91.313 111.76,106.172 113.411,106.944 113.411,110.109 114.808,110.109 114.935,110.236 114.935,105.791
  pour cut-out: 113.284,107.569 113.347,107.632 113.538,107.632
  region: 117.221,106.299 124.333,106.299 124.46,106.426 124.46,107.061 116.459,107.061
  region net NetT2_7: 128.143,111.697 128.905,110.934 129.921,110.934 130.556,111.569 130.556,113.157 131.953,114.554 138.748,114.554 139.827,113.474 139.827,111.316 140.208,110.934 141.605,110.934 141.986,111.316 141.986,113.792 139.573,116.205 131.127,116.205 128.143,113.221 128.143,111.823
  region net NetQ3_2: 124.333,111.506 125.222,110.617 125.857,110.617 127.508,108.966 127.508,105.283 130.683,108.458 125.857,113.284 124.841,113.284 124.333,112.776 124.333,111.633
  region net NetQ3_2: 131.191,108.458 134.112,108.458 135.763,110.109 135.763,112.395 136.398,113.03 137.668,113.03 138.176,112.522 138.176,109.093 133.858,104.775 133.858,101.346 126.238,101.346 126.238,107.315 127.381,108.458
  region net NetQ1_2: 80.264,108.458 83.185,108.458 84.836,110.109 84.836,112.395 85.471,113.03 86.741,113.03 87.249,112.522 87.249,109.093 82.931,104.775 82.931,101.346 75.311,101.346 75.311,107.315 76.454,108.458
  region net NetQ1_2: 73.406,111.506 74.295,110.617 74.93,110.617 76.581,108.966 76.581,105.283 79.756,108.458 74.93,113.284 73.914,113.284 73.406,112.776 73.406,111.633
  region net NetQ1_2: 77.216,111.697 77.978,110.934 78.994,110.934 79.629,111.569 79.629,113.157 81.026,114.554 87.82,114.554 88.9,113.474 88.9,111.316 89.281,110.934 90.678,110.934 91.059,111.316 91.059,113.792 88.646,116.205 80.2,116.205 77.216,113.221 77.216,111.823
  region net NetQ1_1: 66.294,106.299 73.406,106.299 73.533,106.426 73.533,107.061 65.532,107.061
  pour cut-out: 62.357,107.569 62.42,107.632 62.611,107.632
  region net GND: 63.881,104.649 68.962,99.568 70.993,99.568 70.993,96.774 112.67,96.774 112.226,91.44 60.833,91.44 60.833,106.172 62.484,106.807 62.484,110.109 63.881,110.109
  region net NetQ1_3: 66.421,102.616 66.548,102.743 70.612,102.743 71.628,101.727 73.787,101.727 73.787,102.997 71.628,105.156 66.802,105.156 65.278,106.68 64.516,106.68 64.516,104.521
  pour cut-out: 101.346,160.147 102.235,159.258
Signal Bottom:
  region net +5: 56.896,146.435 56.642,146.181 56.642,142.625 57.213,142.054 61.531,142.054 61.976,142.498 61.976,143.387 58.928,143.387 58.801,143.514 58.801,146.308 58.674,146.435 57.023,146.435
  region net +5: 108.331,145.923 108.458,146.05 109.982,146.05 109.982,143.383 110.236,143.129 113.157,143.129 113.411,142.494 113.411,141.605 108.585,141.605 108.204,141.986 108.204,145.923
  region net NetR14_2: 110.49,146.177 110.871,146.558 114.046,146.558 114.046,145.796 113.792,145.542 110.49,145.542 110.49,145.923
  region net NetR6_2: 59.182,146.558 59.563,146.939 62.992,146.939 62.992,146.177 62.611,145.796 59.182,145.796

## Silkscreen, mask and mechanical layers (free items; w line width, h text height)
Top Overlay:
  lines w0.254: 44.958,76.076 ccw(c46.358,76.076) 46.358,74.676 70.736,74.676 ccw(c70.736,76.076) 72.136,76.076 72.136,88.389 ccw(c70.736,88.389) 70.736,89.789 46.358,89.789 ccw(c46.358,88.389) 44.958,88.389 44.958,76.076
  text "IGNITION LEFT" at 69.151,192.431 h3.52
  text "IGNITION RIGHT" at 118.554,192.431 h3.52
  text "HIGH VOLTAGE SIDE" at 51.142,123.556 h3.52 r90
  text "WARNING" at 55.626,123.19 h4.52 r90
  text "- - - - - - - -" at 45.609,121.15 h5.52
  text "- - - - - - - - -" at 92.472,120.769 h5.52
  text "- -" at 142.129,120.261 h5.52
  text "LOW VOLTAGE SIDE" at 51.142,89.774 h3.52 r90
  text "DEBUG" at 68.74,87.772 h3.52 r270
  text "KILL SWITCH" at 131.811,72.546 h3.52
  text "LEFT PULSE   RIGHT PULSE" at 79.995,50.452 h3.52
  text "+12V             GND" at 54.722,50.331 h3.52
  text "HONDA CX500" at 110.414,37.636 h6
  text "DC-CDI" at 115.391,30.935 h10
Bottom Courtyard:
  the board outline again, w0.254

## Text inside footprints (layer, text, board x,y; h text height)
T1: Top Overlay "*" at 96.946,127.698 h1.27 r270; Mechanical 13 "*" at 91.186,127.698 h1.27 r270
T2: Top Overlay "*" at 147.873,127.825 h1.27 r270; Mechanical 13 "*" at 142.113,127.825 h1.27 r270